# EAGLE board Watson (EAGLE 6.2)
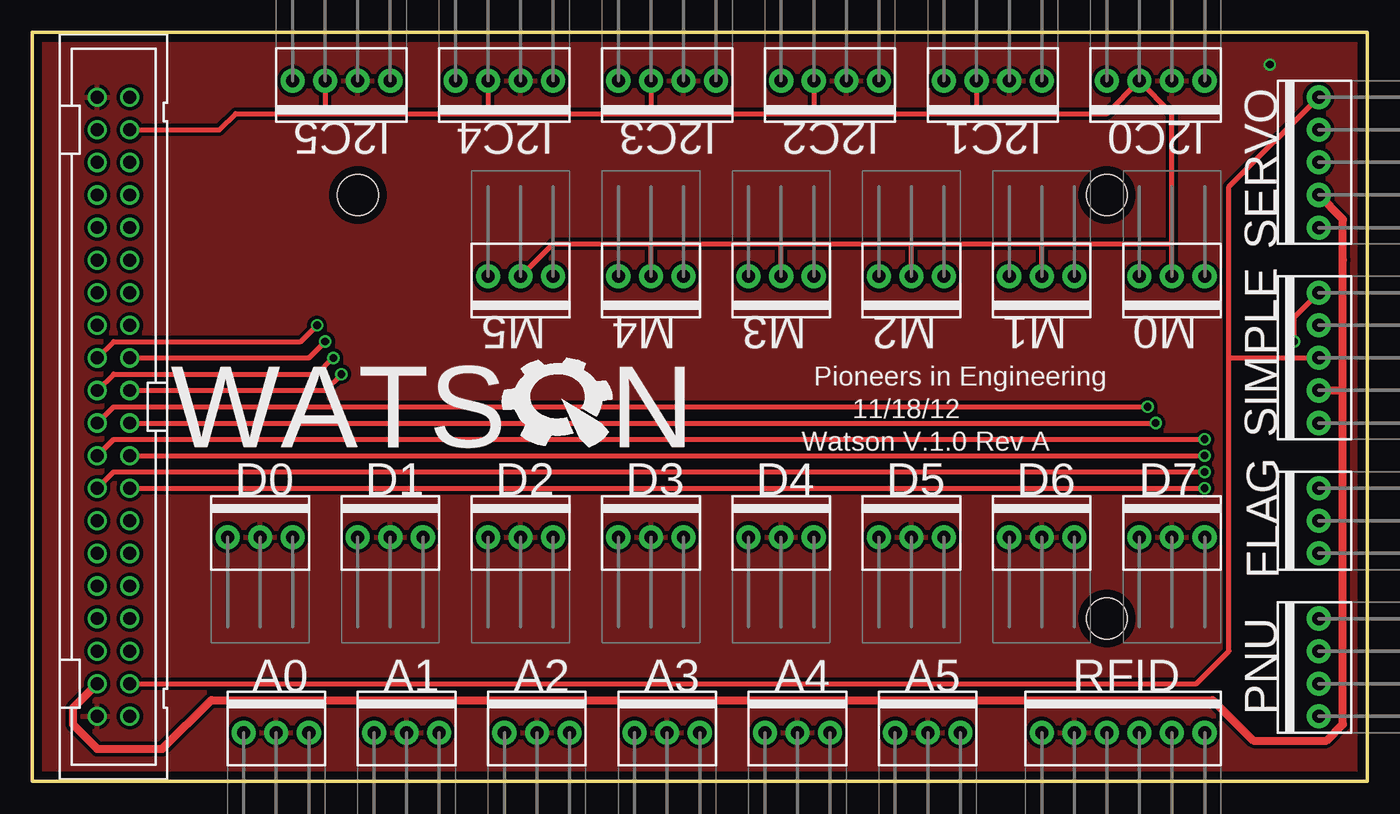
[diagram p0: board, top side]
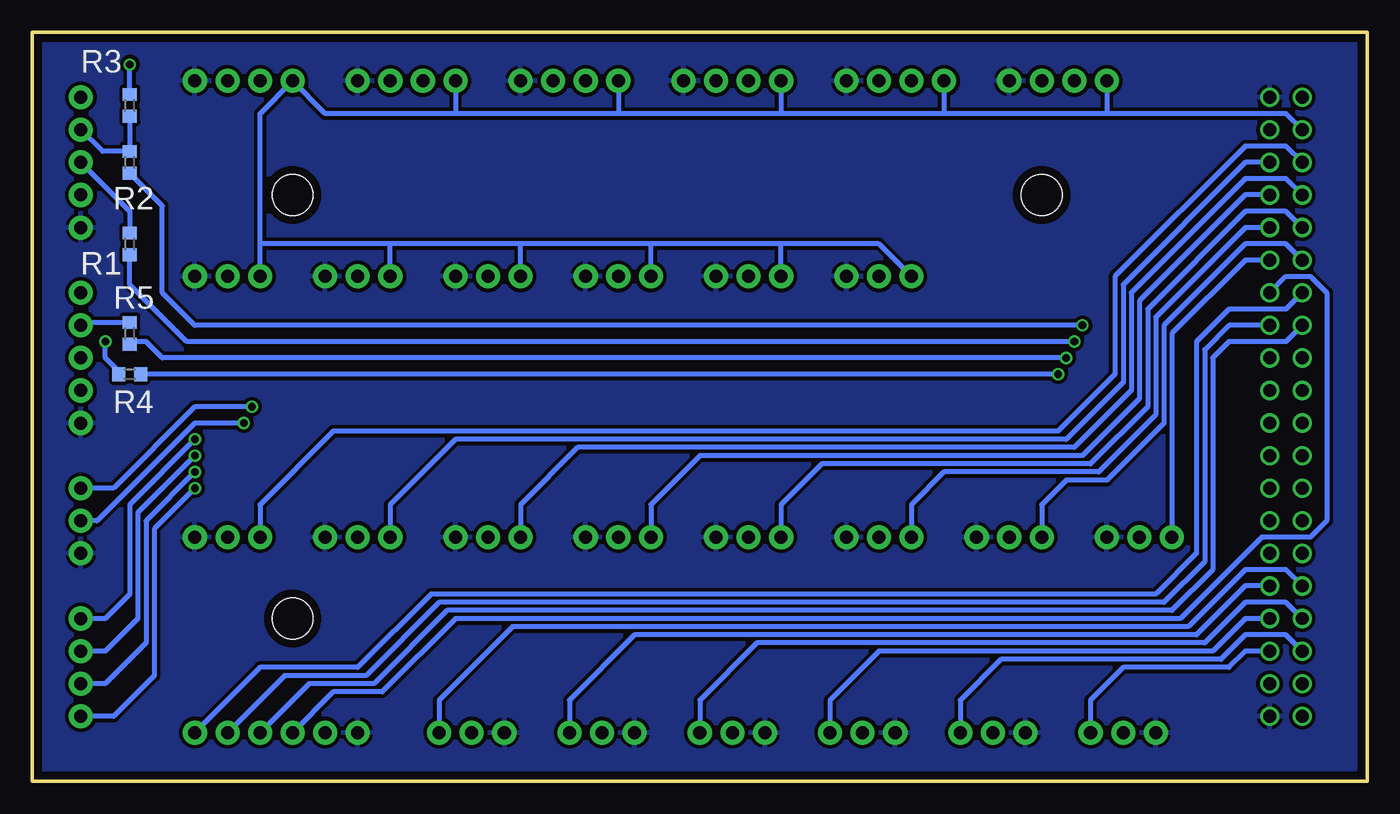
[diagram p1: board, bottom side, seen from below]

Size 104.14 x 58.42 mm. Coordinates in mm from the lower left corner, seen from the top.
Outline: 0,0 104.14,0 104.14,58.42 0,58.42 0,0
Copper layers (1*16): Top 2mil / dielectric 9mil / Bottom 2mil
Design rules: minimum track width 6mil, minimum drill 15mil, track to track 6mil, track to pad 10mil, pad to pad 6mil, via to via 6mil, smd to smd 6mil, copper to edge 25mil, drill to drill 7mil, minimum pad ring 7mil, minimum via ring 7mil, stop-mask expansion 3mil, vias tented up to drill 0mil, thermal gap 10mil
Holes 3.2 mm at 25.4,45.72 83.82,45.72 83.82,12.7

## Footprints (pad centres in the part's own frame; a part is rotated, then mirrored left to right if it is on the bottom)
1X03 = drill 1.016 pad 1.88: 1 0,0; 2 2.54,0; 3 5.08,0
1X04 = drill 1.016 pad 1.88: 1 -3.81,0; 2 -1.27,0; 3 1.27,0; 4 3.81,0
R0603 = smd 1 x 1.1: 1 -0.85,0; 2 0.85,0
1X06 = drill 1.016 pad 1.88: 1 -6.35,0; 2 -3.81,0; 3 -1.27,0; 4 1.27,0; 5 3.81,0; 6 6.35,0
1X05 = drill 1.016 pad 1.88: 1 -5.08,0; 2 -2.54,0; 3 0,0; 4 2.54,0; 5 5.08,0
PAK100/2500-40 = drill 1 pad 1.422: 1 -24.13,-1.27; 2 -24.13,1.27; 3 -21.59,-1.27; 4 -21.59,1.27; 5 -19.05,-1.27; 6 -19.05,1.27; 7 -16.51,-1.27; 8 -16.51,1.27; 9 -13.97,-1.27; 10 -13.97,1.27; 11 -11.43,-1.27; 12 -11.43,1.27; 13 -8.89,-1.27; 14 -8.89,1.27; 15 -6.35,-1.27; 16 -6.35,1.27; 17 -3.81,-1.27; 18 -3.81,1.27; 19 -1.27,-1.27; 20 -1.27,1.27; 21 1.27,-1.27; 22 1.27,1.27; 23 3.81,-1.27; 24 3.81,1.27; 25 6.35,-1.27; 26 6.35,1.27; 27 8.89,-1.27; 28 8.89,1.27; 29 11.43,-1.27; 30 11.43,1.27; 31 13.97,-1.27; 32 13.97,1.27; 33 16.51,-1.27; 34 16.51,1.27; 35 19.05,-1.27; 36 19.05,1.27; 37 21.59,-1.27; 38 21.59,1.27; 39 24.13,-1.27; 40 24.13,1.27

## Placement (x,y rotation side)
A0  [1X03]  16.51,3.81 0 top
A1  [1X03]  26.67,3.81 0 top
A2  [1X03]  36.83,3.81 0 top
A3  [1X03]  46.99,3.81 0 top
A4  [1X03]  57.15,3.81 0 top
A5  [1X03]  67.31,3.81 0 top
D0  [1X03]  15.24,19.05 0 top
D1  [1X03]  25.4,19.05 0 top
D2  [1X03]  35.56,19.05 0 top
D3  [1X03]  45.72,19.05 0 top
D4  [1X03]  55.88,19.05 0 top
D5  [1X03]  66.04,19.05 0 top
D6  [1X03]  76.2,19.05 0 top
D7  [1X03]  86.36,19.05 0 top
FLAG  [1X03]  100.33,17.78 90 top
I2C0  M04  [1X04]  87.63,54.61 180 top
I2C1  M04  [1X04]  74.93,54.61 180 top
I2C2  M04  [1X04]  62.23,54.61 180 top
I2C3  M04  [1X04]  49.53,54.61 180 top
I2C4  M04  [1X04]  36.83,54.61 180 top
I2C5  M04  [1X04]  24.13,54.61 180 top
M0  [1X03]  91.44,39.37 180 top
M1  [1X03]  81.28,39.37 180 top
M2  [1X03]  71.12,39.37 180 top
M3  [1X03]  60.96,39.37 180 top
M4  [1X03]  50.8,39.37 180 top
M5  [1X03]  40.64,39.37 180 top
PNU  M04  [1X04]  100.33,8.89 90 top
R1  200  [R0603]  96.52,41.91 270 bottom
R2  200  [R0603]  96.52,48.26 270 bottom
R3  200k  [R0603]  96.52,52.7 90 bottom
R4  200  [R0603]  96.52,31.75 0 bottom
R5  200  [R0603]  96.52,34.92 270 bottom
RFID  M06  [1X06]  85.09,3.81 0 top
SERVO  Servos  [1X05]  100.33,48.26 90 top
SIMPLE  Servos  [1X05]  100.33,33.02 90 top
U$1  [WATSON]  28.57,28.57 0 top
X1  2540-FLAT  [PAK100/2500-40]  6.35,29.21 90 top

## Library data of the parts
A0 A1-A5 D0 D1-D7 FLAG M0 M1-M5 U$1 = pie
I2C0 I2C1-I2C5 PNU RFID SERVO SIMPLE = MTA-connectors
R1-R5 = resistor
X1 = pie; OC_FARNELL: unknown; OC_NEWARK: unknown

## Nets
5V: SERVO.2 SIMPLE.2 X1.4
ADC0: A5.3 X1.10
ADC1: A4.3 X1.9
ADC2: A3.3 X1.8
ADC3: A2.3 X1.7
ADC4: A1.3 X1.6
ADC5: A0.3 X1.5
GND: A0.1 A1.1 A2.1 A3.1 A4.1 A5.1 D0.3 D1.3 D2.3 D3.3 D4.3 D5.3 D6.3 D7.3 FLAG.1 I2C0.1 I2C1.1 I2C2.1 I2C3.1 I2C4.1 I2C5.1 M0.1 M1.1 M2.1 M3.1 M4.1 M5.1 RFID.1 SERVO.1 SIMPLE.1 X1.1 X1.39
IO21: PNU.3 X1.17
IO51: D7.1 X1.36
IO52: D6.1 X1.35
IO53: D5.1 X1.34
IO54: D4.1 X1.33
IO55: D3.1 X1.32
IO56: D2.1 X1.31
IO57: D1.1 X1.30
IO58: D0.1 X1.29
IO63: PNU.2 X1.16
IO64: PNU.1 X1.15
IO65: PNU.4 X1.18
IO66: FLAG.3 X1.20
IO67: FLAG.2 X1.19
IO/SELECT: RFID.6 X1.28
MISO: RFID.4 X1.26
MOSI: RFID.5 X1.25
N$1: R2.1 R3.1 SERVO.4
N$2: R1.1 SERVO.3
N$5: R4.1 SIMPLE.5
N$6: R5.1 SIMPLE.4
RESET#: SERVO.5 SIMPLE.3 X1.3
RXD1: R2.2 X1.24
RXD2: R5.2 X1.22
SCK: RFID.3 X1.27
SCL: I2C0.4 I2C1.4 I2C2.4 I2C3.4 I2C4.4 I2C5.4 M0.3 M1.3 M2.3 M3.3 M4.3 M5.3 X1.38
SDA: I2C0.3 I2C1.3 I2C2.3 I2C3.3 I2C4.3 I2C5.3 M0.2 M1.2 M2.2 M3.2 M4.2 M5.2 X1.37
TXD1: R1.2 X1.23
TXD2: R4.2 X1.21
VCC: A0.2 A1.2 A2.2 A3.2 A4.2 A5.2 D0.2 D1.2 D2.2 D3.2 D4.2 D5.2 D6.2 D7.2 I2C0.2 I2C1.2 I2C2.2 I2C3.2 I2C4.2 I2C5.2 R3.2 RFID.2 X1.2 X1.40

## Tracks (layer width: path | path; a pad name or v marks a point on that pad's centre or on a via)
5V
  Top 0.61: 102.23,30.48 102.23,4.45 100.97,3.17 95.25,3.17 92.08,6.35 13.97,6.35 10.16,2.54 5.08,2.54 3.17,4.45 3.17,5.71 X1.4 | 102.23,30.48 102.23,40.64 102.23,43.81 SERVO.2 | SIMPLE.2 102.23,30.48
ADC0
  Bottom 0.406: X1.10 6.35,16.51 9.53,16.51 13.97,12.06 66.67,12.06 72.39,6.35 A5.3
ADC1
  Bottom 0.406: X1.9 9.53,15.24 13.34,11.43 57.15,11.43 62.23,6.35 A4.3
ADC2
  Bottom 0.406: X1.8 6.35,13.97 9.53,13.97 12.7,10.79 47.62,10.79 52.07,6.35 A3.3
ADC3
  Bottom 0.406: X1.7 9.53,12.7 12.06,10.16 38.1,10.16 41.91,6.35 A2.3
ADC4
  Bottom 0.406: X1.6 6.35,11.43 9.53,11.43 11.43,9.53 28.57,9.53 31.75,6.35 A1.3
ADC5
  Bottom 0.406: X1.5 9.53,10.16 10.79,8.89 19.05,8.89 21.59,6.35 A0.3
GND
  pour Bottom (isolate 0.279): 104.14,58.42 104.14,0 0,0 0,58.42
IO21  (via drill 0.6)
  Top 0.406: X1.17 v91.44,25.4
  Bottom 0.406: v91.44,25.4 95.89,20.95 95.89,12.7 98.42,10.16 PNU.3
IO51
  Bottom 0.406: X1.36 6.35,49.53 9.53,49.53 19.68,39.37 19.68,31.75 24.13,27.3 80.64,27.3 86.36,21.59 D7.1
IO52
  Bottom 0.406: X1.35 9.53,48.26 19.05,38.73 19.05,31.11 23.5,26.67 71.12,26.67 76.2,21.59 D6.1
IO53
  Bottom 0.406: X1.34 6.35,46.99 9.53,46.99 18.41,38.1 18.41,30.48 22.86,26.04 61.59,26.04 66.04,21.59 D5.1
IO54
  Bottom 0.406: X1.33 9.53,45.72 17.78,37.47 17.78,29.84 22.23,25.4 52.07,25.4 55.88,21.59 D4.1
IO55
  Bottom 0.406: X1.32 6.35,44.45 9.53,44.45 17.14,36.83 17.14,29.21 21.59,24.77 42.55,24.77 45.72,21.59 D3.1
IO56
  Bottom 0.406: X1.31 9.53,43.18 16.51,36.2 16.51,28.57 20.95,24.13 33.02,24.13 35.56,21.59 D2.1
IO57
  Bottom 0.406: X1.30 6.35,41.91 9.53,41.91 15.88,35.56 15.88,27.94 20.32,23.5 23.5,23.5 25.4,21.59 D1.1
IO58
  Bottom 0.406: X1.29 9.53,40.64 15.24,34.92 D0.1
IO63  (via drill 0.6)
  Top 0.406: X1.16 6.35,24.13 v91.44,24.13
  Bottom 0.406: v91.44,24.13 95.25,20.32 95.25,10.79 98.42,7.62 PNU.2
IO64  (via drill 0.6)
  Top 0.406: X1.15 v91.44,22.86
  Bottom 0.406: v91.44,22.86 94.61,19.68 94.61,8.26 97.79,5.08 PNU.1
IO65  (via drill 0.6)
  Top 0.406: X1.18 6.35,26.67 v91.44,26.67
  Bottom 0.406: v91.44,26.67 96.52,21.59 96.52,14.61 98.42,12.7 PNU.4
IO66  (via drill 0.6)
  Top 0.406: X1.20 6.35,29.21 v87,29.21
  Bottom 0.406: v87,29.21 91.44,29.21 97.79,22.86 FLAG.3
IO67  (via drill 0.6)
  Top 0.406: X1.19 v87.63,27.94
  Bottom 0.406: v87.63,27.94 91.44,27.94 99.06,20.32 FLAG.2
IO/SELECT
  Bottom 0.406: X1.28 6.35,36.83 10.79,36.83 13.34,34.29 13.34,17.78 16.51,14.61 73.03,14.61 78.74,8.89 86.36,8.89 RFID.6
MISO
  Bottom 0.406: X1.26 6.35,34.29 10.79,34.29 12.06,33.02 12.06,16.51 15.24,13.34 71.75,13.34 77.47,7.62 82.55,7.62 RFID.4
MOSI
  Bottom 0.406: X1.25 10.79,35.56 12.7,33.66 12.7,17.14 15.88,13.97 72.39,13.97 78.11,8.26 84.45,8.26 RFID.5
N$1
  Bottom 0.406: R3.1 R2.1 98.64,49.11 SERVO.4
N$2
  Bottom 0.406: SERVO.3 96.52,44.45 R1.1
N$5  (via drill 0.6)
  Top 0.406: v98.42,34.29 98.42,36.2 SIMPLE.5
  Bottom 0.406: R4.1 97.37,31.96 98.42,33.02 v98.42,34.29
N$6
  Bottom 0.406: R5.1 100.11,35.77 SIMPLE.4
RESET#
  Top 0.406: X1.3 90.81,7.62 93.34,10.16 93.34,33.02 | 93.34,33.02 93.34,46.35 SERVO.5 | 93.34,33.02 SIMPLE.3
RXD1  (via drill 0.6)
  Top 0.406: X1.24 6.35,34.29 20.95,34.29 v22.23,35.56
  Bottom 0.406: v22.23,35.56 91.44,35.56 93.98,38.1 93.98,44.87 R2.2
RXD2  (via drill 0.6)
  Top 0.406: X1.22 6.35,31.75 22.23,31.75 v23.5,33.02
  Bottom 0.406: v23.5,33.02 93.98,33.02 95.25,34.29 96.31,34.29 R5.2
SCK
  Bottom 0.406: X1.27 6.35,39.37 4.45,39.37 3.17,38.1 3.17,20.32 4.45,19.05 8.26,19.05 14.61,12.7 71.12,12.7 76.83,6.99 80.64,6.99 RFID.3
SCL
  Bottom 0.406: X1.38 6.35,52.07 20.32,52.07 | 20.32,52.07 33.02,52.07 | 33.02,52.07 45.72,52.07 | 45.72,52.07 58.42,52.07 | 58.42,52.07 71.12,52.07 | 71.12,52.07 81.28,52.07 I2C0.4 86.36,52.07 86.36,41.91 | M0.3 86.36,41.91 | M5.3 38.1,41.91 45.72,41.91 | 45.72,41.91 55.88,41.91 | 55.88,41.91 66.04,41.91 | 66.04,41.91 76.2,41.91 | 76.2,41.91 86.36,41.91 | M4.3 45.72,41.91 | M3.3 55.88,41.91 | M2.3 66.04,41.91 | M1.3 76.2,41.91 | I2C1.4 71.12,52.07 | I2C2.4 58.42,52.07 | I2C3.4 45.72,52.07 | I2C4.4 33.02,52.07 | I2C5.4 20.32,52.07
SDA
  Top 0.406: X1.37 14.61,50.8 15.88,52.07 22.86,52.07 | 22.86,52.07 35.56,52.07 | 35.56,52.07 48.26,52.07 | 48.26,52.07 60.96,52.07 | 60.96,52.07 73.66,52.07 | 73.66,52.07 83.82,52.07 I2C0.3 88.9,52.07 88.9,41.91 | M0.2 88.9,41.91 | I2C5.3 22.86,52.07 | I2C4.3 35.56,52.07 | I2C3.3 48.26,52.07 | I2C2.3 60.96,52.07 | I2C1.3 73.66,52.07 | M1.2 78.74,41.91 | 78.74,41.91 88.9,41.91 | 48.26,41.91 40.64,41.91 M5.2 | 48.26,41.91 58.42,41.91 | 58.42,41.91 68.58,41.91 | 68.58,41.91 78.74,41.91 | M2.2 68.58,41.91 | M3.2 58.42,41.91 | M4.2 48.26,41.91
TXD1  (via drill 0.6)
  Top 0.406: X1.23 21.59,33.02 v22.86,34.29
  Bottom 0.406: v22.86,34.29 92.08,34.29 96.52,38.73 R1.2
TXD2  (via drill 0.6)
  Top 0.406: X1.21 22.86,30.48 v24.13,31.75
  Bottom 0.406: v24.13,31.75 R4.2
VCC  (via drill 0.6)
  Bottom 0.406: R3.2 v96.52,55.88
  pour Top (isolate 0.279): 0,0 0,58.42 104.14,58.42 104.14,0

## Text on the board
tPlace: Pioneers in Engineering | 11/18/12 | Watson V.1.0 Rev A